# Altium PCB Callisto Control Board.PcbDoc
Units mm, origin at the board's own origin, x right, y up, seen from the top; angles counter-clockwise.
Board outline 85 x 56 mm, 4 copper layers (Top Layer, Layer 1, Layer 2, Bottom Layer), stack 1.767 mm thick; 62 components, 37 nets, 212 pads, 0 vias.
Unrouted connection lines stored in the file: 133.
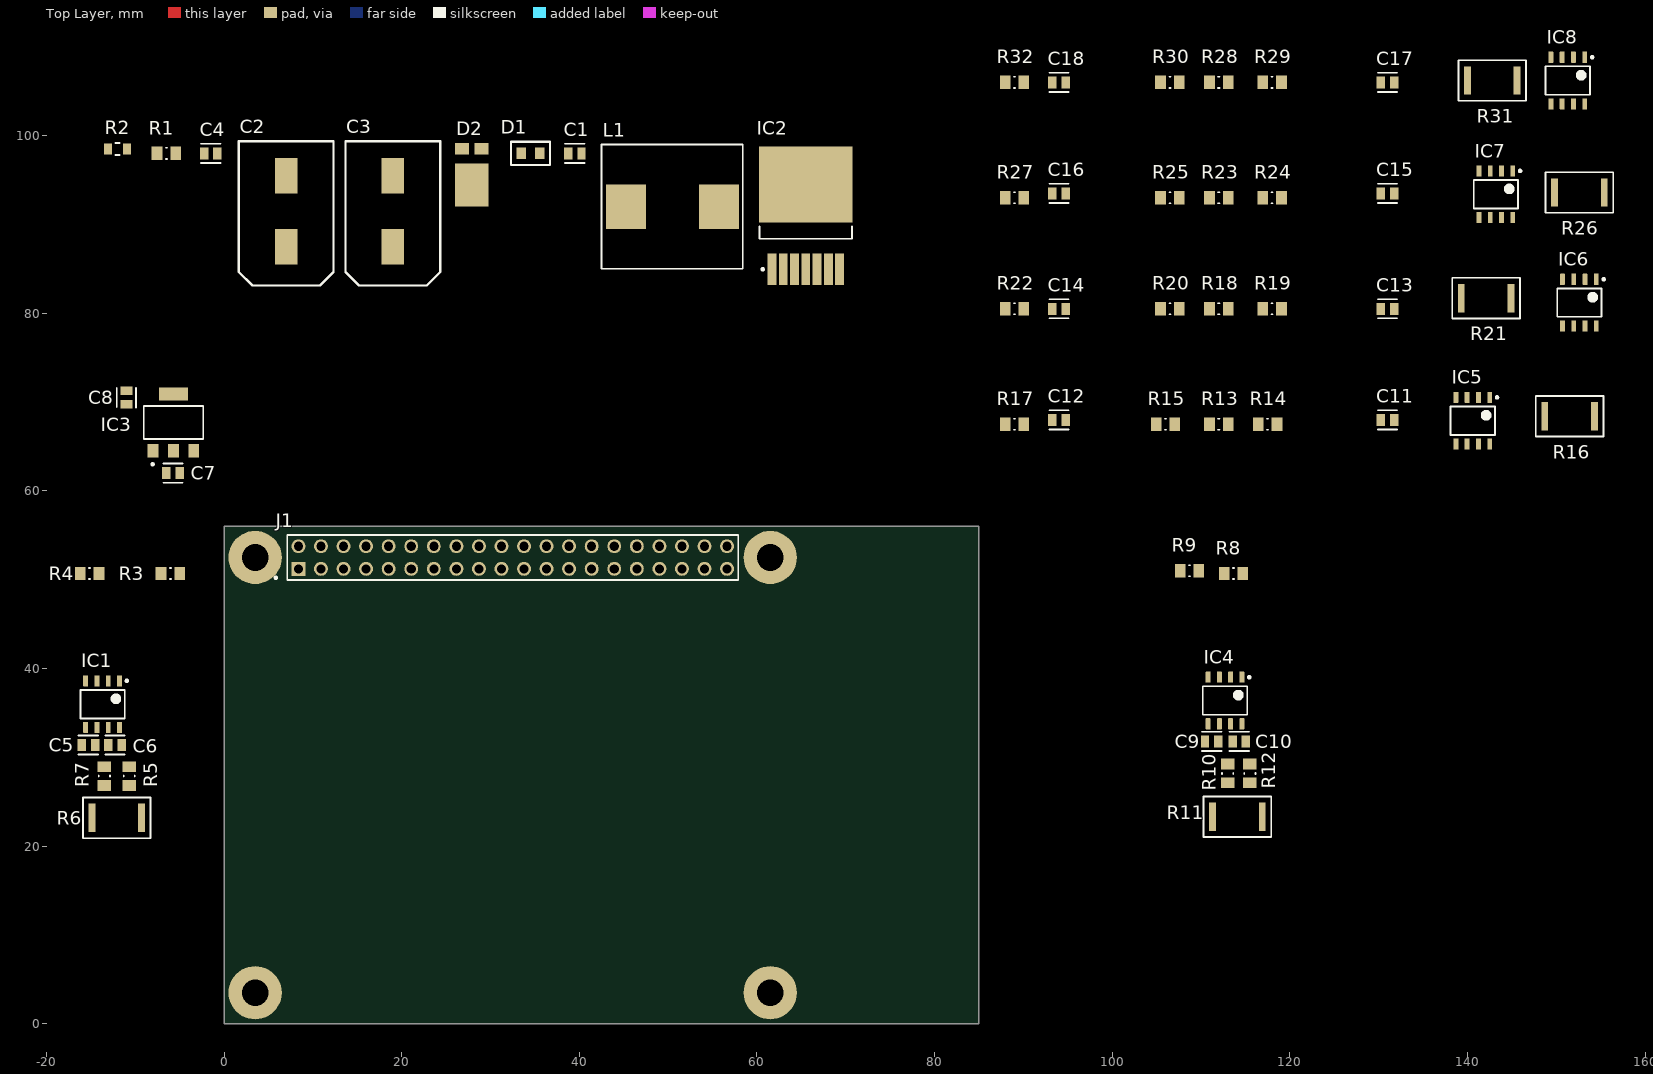
[diagram p0: Top Layer view]
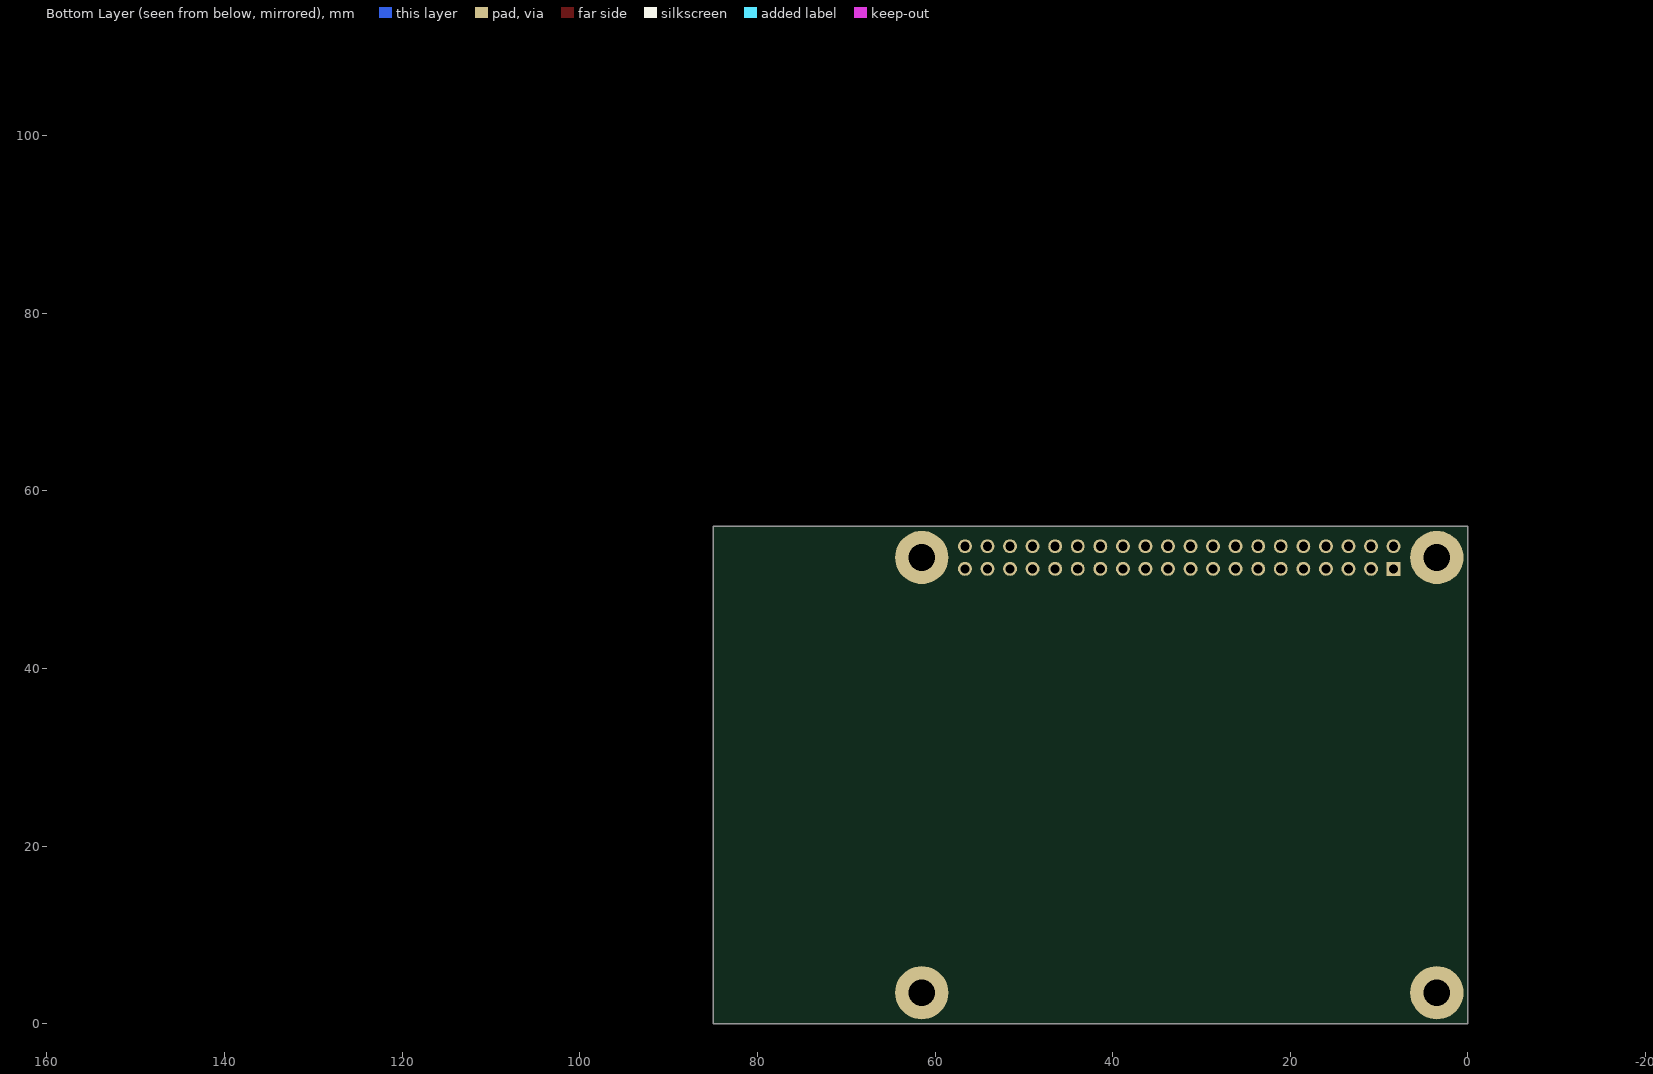
[diagram p1: Bottom Layer view, seen from below]
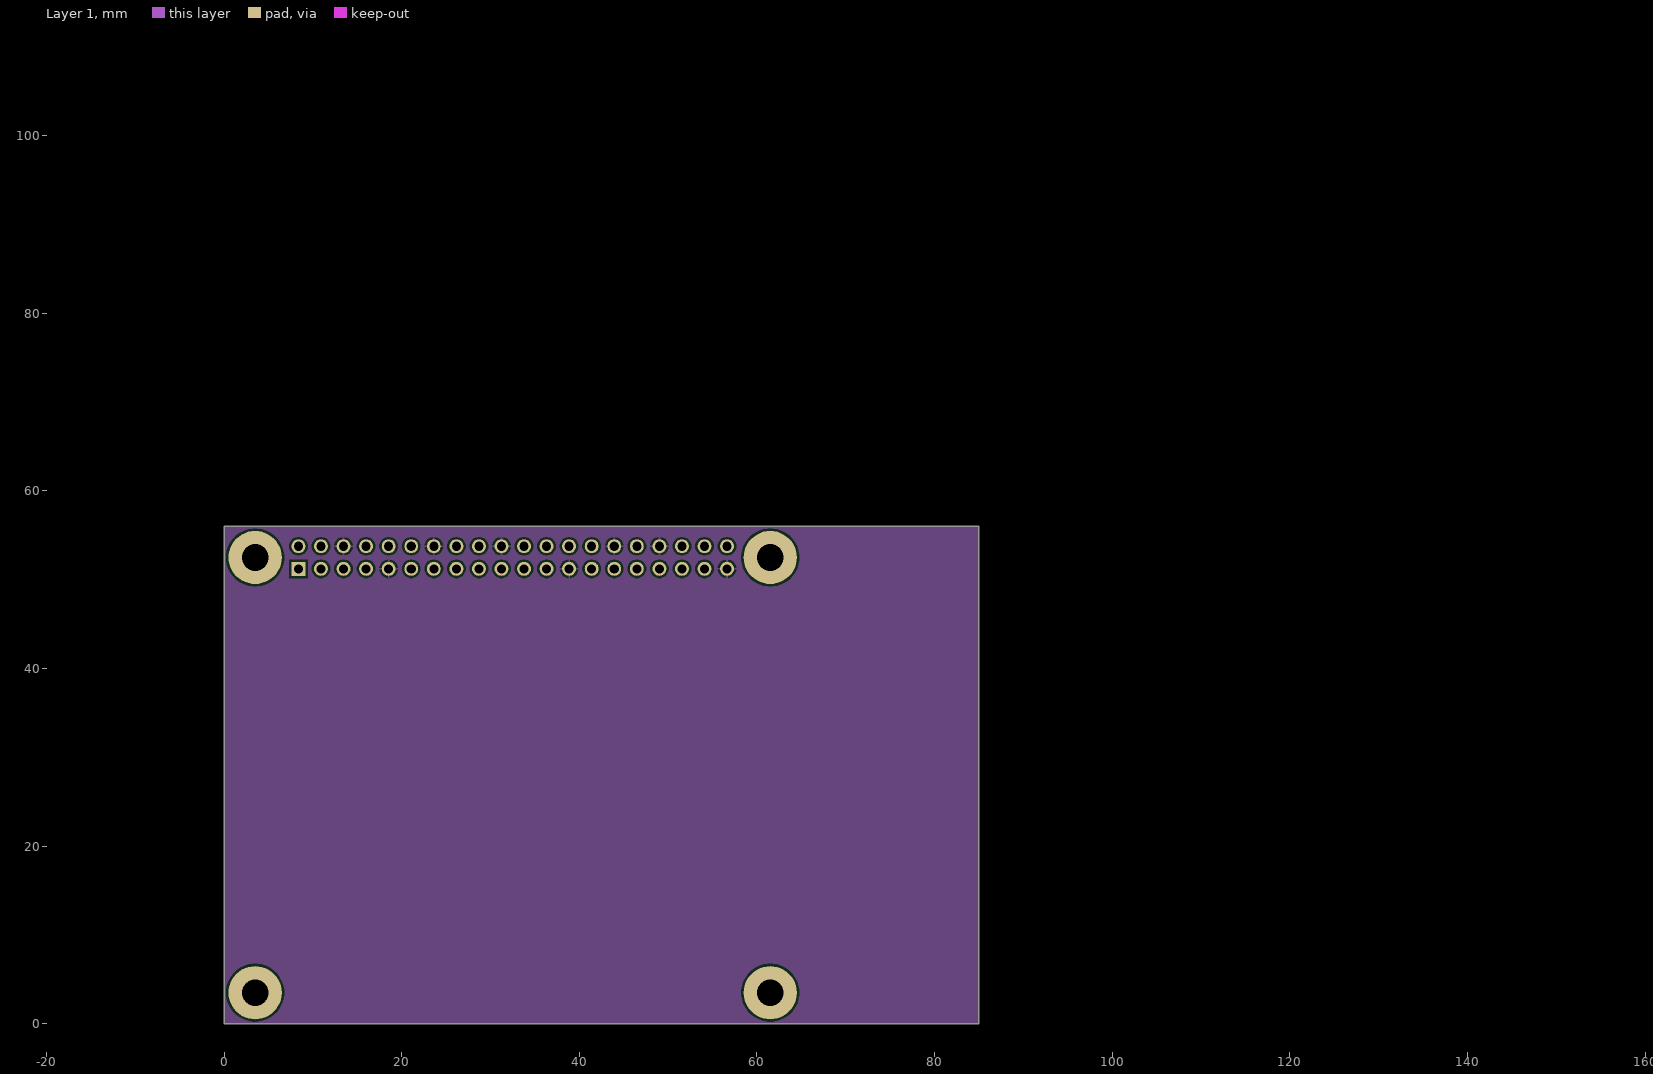
[diagram p2: Layer 1]
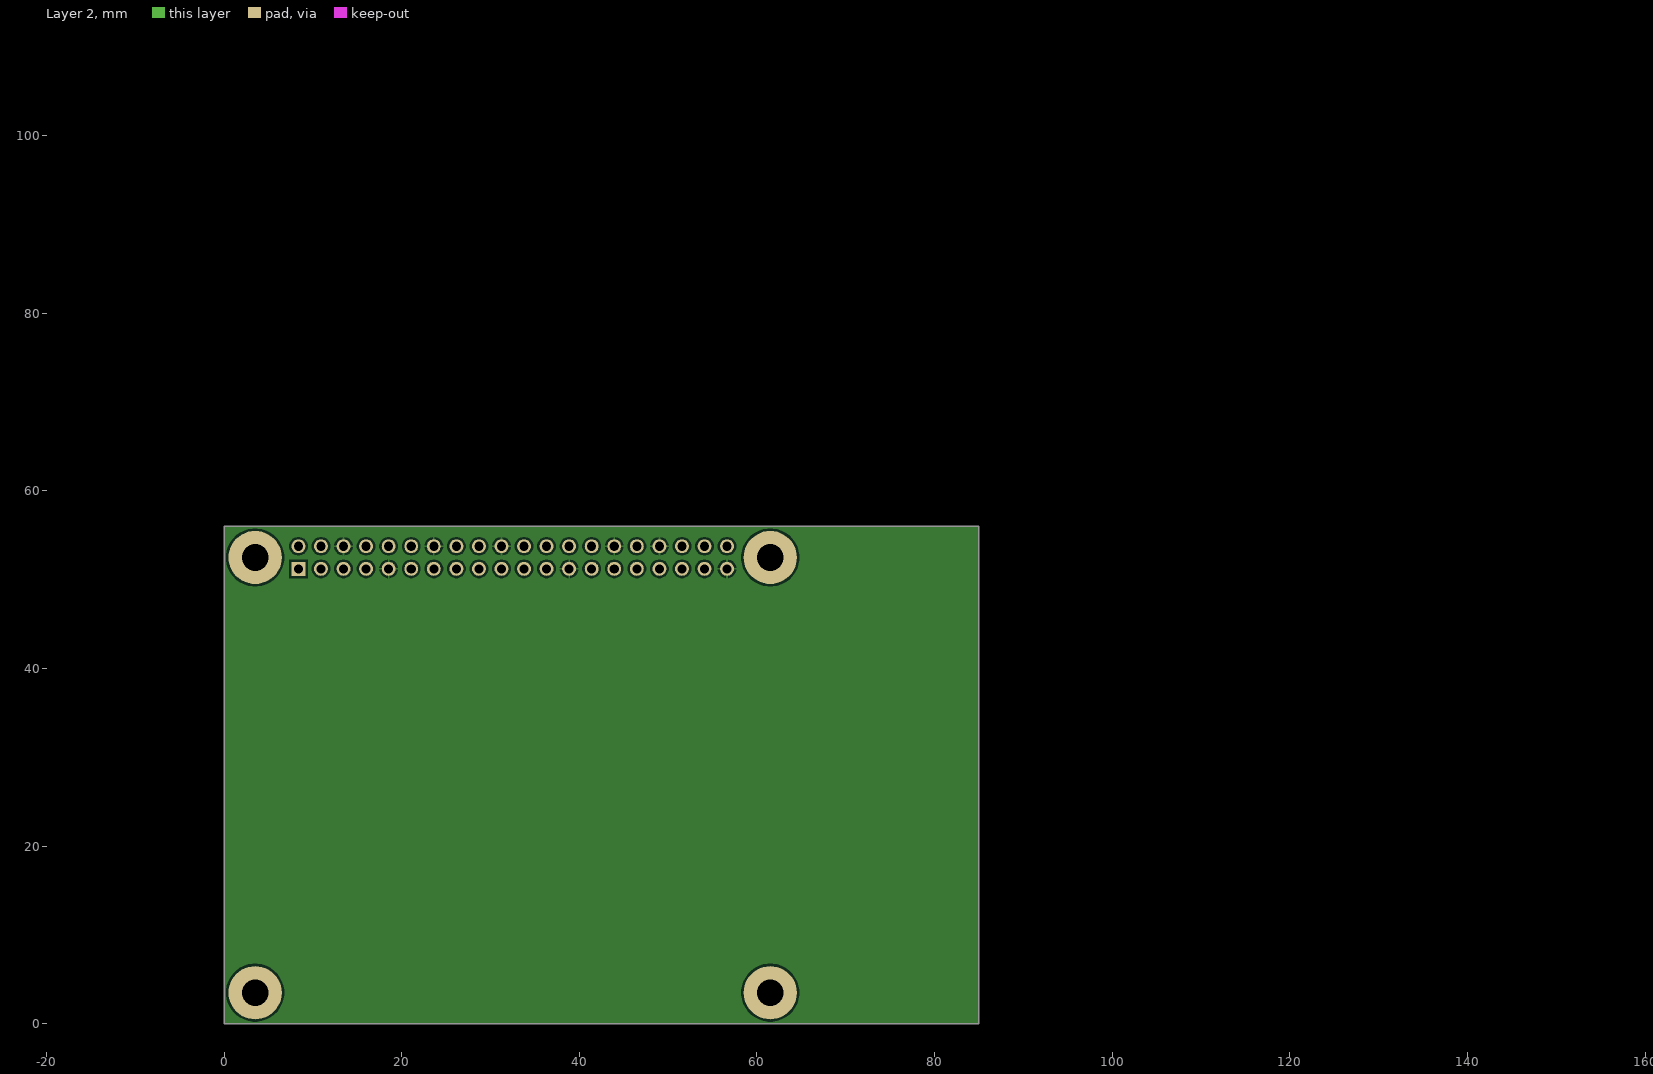
[diagram p3: Layer 2]

## Layer stack, top to bottom
Top Solder: solder mask 0.0203, Solder Resist, Dk 3.5
Top Layer: signal copper 0.0533
Dielectric 2: prepreg 0.0711, PP-006, Dk 4.1
Layer 1: signal copper 0.035
Dielectric 1: dielectric 1.4478, FR-4, Dk 4.6
Layer 2: signal copper 0.035
Dielectric 3: prepreg 0.0711, PP-006, Dk 4.1
Bottom Layer: signal copper 0.0533
Bottom Solder: solder mask 0.0203, Solder Resist, Dk 3.5

## Board outline
0,0 0,56 85,56 85,0

## Design rules (kind name [scope] priority, off if disabled: settings)
Clearance [All] p1: gap=0.254 ignorepadtopadclearanceinfootprint=FALSE except(0: Arc-Hole Track-Hole SMDPad-Hole THPad-Hole Via-Hole Fill-Hole Poly-Hole Region-Hole Text-Hole)
PolygonConnect [All] p1: connectstyle=Relief reliefconductorwidth=0.254 reliefentries=4 polygonreliefangle="90 Angle" airgapwidth=0.254
RoutingVias [All] p1: holewidth=0.711 width=1.27 viastyle="Through Hole" minholewidth=0.711 minwidth=1.27 maxholewidth=0.711 maxwidth=1.27
SolderMaskExpansion [All] p1: expansion=0.102 istentingtop=FALSE
Width [All] p1: maxlimit=0.254 minlimit=0.254 preferedwidth=0.254
30 further rules are at their usual default settings.

## Classes and differential pairs
component class "Raspberry Pi": J1
component class INA219: C17 C18 IC8 R28 R29 R30 R31 R32
component class "DC/DC Converter": C1 C2 C3 C4 D1 D2 IC2 L1 R1 R2
component class "3V3 Low Dropout Regulator": C7 C8 IC3

## Components (designator, comment, footprint, x,y, rotation, side; value= is the part's Value field where it differs from the comment)
C1 "10nF" FP-C0805C-DN-MFG 39.5,98 r0 top value="10,000 pF"
C2 "100uF" AHA1010101M040R 7,91.5 r90 top
C3 "100uF" AHA1010101M040R 19,91.5 r90 top
C4 "470pF" FP-C0805C-DN-MFG -1.5,98 r0 top value="470 pF"
C5 "0.1 uF" FP-C0805C-DN-MFG -15.276,31.386 r0 top value="0.10 μF"
C6 "0.1 uF" FP-C0805C-DN-MFG -12.276,31.386 r180 top value="0.10 μF"
C7 "0.1 μF" FP-C0805C-DN-MFG -5.75,62 r180 top
C8 "10 uF" FP-C0805C-DG-MFG -11,70.5 r270 top
C9 "0.1 uF" FP-C0805C-DN-MFG 111.2,31.8 r0 top value="0.10 μF"
C10 "0.1 uF" FP-C0805C-DN-MFG 114.3,31.8 r180 top value="0.10 μF"
C11 "0.1 uF" FP-C0805C-DN-MFG 131,68 r0 top value="0.10 μF"
C12 "0.1 uF" FP-C0805C-DN-MFG 94,68 r0 top value="0.10 μF"
C13 "0.1 uF" FP-C0805C-DN-MFG 131,80.5 r0 top value="0.10 μF"
C14 "0.1 uF" FP-C0805C-DN-MFG 94,80.5 r0 top value="0.10 μF"
C15 "0.1 uF" FP-C0805C-DN-MFG 131,93.5 r0 top value="0.10 μF"
C16 "0.1 uF" FP-C0805C-DN-MFG 94,93.5 r0 top value="0.10 μF"
C17 "0.1 uF" FP-C0805C-DN-MFG 131,106 r0 top value="0.10 μF"
C18 "0.1 uF" FP-C0805C-DN-MFG 94,106 r0 top value="0.10 μF"
D1 "0805 GREEN" "0805 LED" 34.5,98 r0 top
D2 "PMEG045V050EPEZ" PMEG045V050EPE 26,92 r0 top
IC1 "INA219AIDR" INA219AIDR -13.676,35.986 r270 top
IC2 "LM2679SX-12" TS7B_M 65.5,91 r90 top
IC3 "LD1117S33CTR" LD1117 -5.7,67.7 r90 top
IC4 "INA219AIDR" INA219AIDR 112.7,36.4 r270 top
IC5 "INA219AIDR" INA219AIDR 140.6,67.9 r270 top
IC6 "INA219AIDR" INA219AIDR 152.6,81.2 r270 top
IC7 "INA219AIDR" INA219AIDR 143.2,93.4 r270 top
IC8 "INA219AIDR" INA219AIDR 151.3,106.2 r270 top
J1 "PRT-16763" FP-SFH11-PBPC-D20-ST-BK-MFG 8.375,51.225 r0 top
L1 "7443551331" "7443551331 33uH" 50.5,92 r0 top
R1 "5k6" FP-CRCW0805-e3-IPC_A -6.5,98 r0 top
R2 "RT0805DRE07511RL" FP-RT0805-MFG -12,98.5 r0 top value=511Ω
R3 "3k3" "0805 Resistor - IPC A" -6.051,50.7 r180 top
R4 "3k3" "0805 Resistor - IPC A" -15.126,50.7 r180 top
R5 "10R" "0805 Resistor - IPC A" -10.676,27.886 r270 top
R6 "100 mΩ" PE2512FKM070R1L -12.076,23.186 r0 top
R7 "10R" "0805 Resistor - IPC A" -13.476,27.886 r270 top
R8 "3k3" "0805 Resistor - IPC A" 113.651,50.7 r0 top
R9 "3k3" "0805 Resistor - IPC A" 108.7,51 r0 top
R10 "10R" "0805 Resistor - IPC A" 113,28.2 r270 top
R11 "100 mΩ" PE2512FKM070R1L 114.1,23.3 r180 top
R12 "10R" "0805 Resistor - IPC A" 115.5,28.2 r90 top
R13 "3k3" "0805 Resistor - IPC A" 112,67.5 r0 top
R14 "3k3" "0805 Resistor - IPC A" 117.5,67.5 r0 top
R15 "10R" "0805 Resistor - IPC A" 106,67.5 r0 top
R16 "100 mΩ" PE2512FKM070R1L 151.5,68.4 r0 top
R17 "10R" "0805 Resistor - IPC A" 89,67.5 r0 top
R18 "3k3" "0805 Resistor - IPC A" 112,80.5 r0 top
R19 "3k3" "0805 Resistor - IPC A" 118,80.5 r0 top
R20 "10R" "0805 Resistor - IPC A" 106.5,80.5 r0 top
R21 "100 mΩ" PE2512FKM070R1L 142.1,81.7 r0 top
R22 "10R" "0805 Resistor - IPC A" 89,80.5 r0 top
R23 "3k3" "0805 Resistor - IPC A" 112,93 r0 top
R24 "3k3" "0805 Resistor - IPC A" 118,93 r0 top
R25 "10R" "0805 Resistor - IPC A" 106.5,93 r0 top
R26 "100 mΩ" PE2512FKM070R1L 152.6,93.6 r0 top
R27 "10R" "0805 Resistor - IPC A" 89,93 r0 top
R28 "3k3" "0805 Resistor - IPC A" 112,106 r0 top
R29 "3k3" "0805 Resistor - IPC A" 118,106 r0 top
R30 "10R" "0805 Resistor - IPC A" 106.5,106 r0 top
R31 "100 mΩ" PE2512FKM070R1L 142.795,106.2 r0 top
R32 "10R" "0805 Resistor - IPC A" 89,106 r0 top

## Footprints (in the part's own frame and the unit in brackets; to place one, negate y for a bottom-side part, rotate by r counter-clockwise, add the part's x,y. Pads: shape width x height; smd on the part's side, far side on the other; paste and mask are expansions set on the pad)
"0805 LED" [mm] "Wurth Electronics  / 150080VS75000"
  rect 1.1x1.3 smd: 1(-1.05,0) 2(1.05,0)
  round 1 on Top Overlay: ""(-3.1,-2)
  silkscreen extent -2.2,-1.3 2.2,1.3
"0805 Resistor - IPC A" [mil]
  rect 47.5x59.38 smd paste+0 mask+0: 1(-41.37,0) 2(41.37,0)
  silkscreen extent -3,-25 3,25, body extent -85,-49 85,49, height 10
"7443551331 33uH" [mm] "Wurth Electronics 7443551331 33uH"
  rect 4.5x5 smd: 1(-5.25,0) 2(5.25,0)
  silkscreen extent -8,-7 7.9,7
AHA1010101M040R [mm]
  rect 4x2.5 smd: 1(-4,0) 2(4,0)
  silkscreen extent -8.38,-5.33 7.87,5.33
FP-C0805C-DG-MFG [mm]
  rect 0.95x1.35 smd paste+0 mask+0: 1(-0.75,0) 2(0.75,0)
  silkscreen extent -1.11,-1.08 1.1,1.07, body extent -1.4,-0.85 1.4,0.85, height 0.25
FP-C0805C-DN-MFG [mm]
  rect 0.95x1.35 smd paste+0 mask+0: 1(-0.75,0) 2(0.75,0)
  silkscreen extent -1.1,-1.07 1.1,1.07, body extent -1.4,-0.85 1.4,0.85, height 0.25
FP-CRCW0805-e3-IPC_A [mil]
  rect 47.5x59.38 smd paste+0 mask+0: 1(-41.37,0) 2(41.37,0)
  silkscreen extent -3,-25 3,25, body extent -85,-49 85,49, height 10
FP-RT0805-MFG [mm]
  rect 0.9x1.2 smd paste+0 mask+0: 1(-1.05,0) 2(1.05,0)
  silkscreen extent -0.23,-0.67 0.23,0.67, body extent -1.6,-0.77 1.6,0.77, height 0.25
FP-SFH11-PBPC-D20-ST-BK-MFG [mm]
  rect 1.57x1.57 hole 1.02 paste-2539.97 mask+0: 1(0,0)
  round 1.57 hole 1.02 paste-2539.97 mask+0: 2(0,2.54) 3(2.54,0) 4(2.54,2.54) 5(5.08,0) 6(5.08,2.54) 7(7.62,0) 8(7.62,2.54) 9(10.16,0) 10(10.16,2.54) 11(12.7,0) 12(12.7,2.54) 13(15.24,0) 14(15.24,2.54) 15(17.78,0) 16(17.78,2.54) 17(20.32,0) 18(20.32,2.54) 19(22.86,0) 20(22.86,2.54) 21(25.4,0) 22(25.4,2.54) 23(27.94,0) 24(27.94,2.54) 25(30.48,0) 26(30.48,2.54) 27(33.02,0) 28(33.02,2.54) 29(35.56,0) 30(35.56,2.54) 31(38.1,0) 32(38.1,2.54) 33(40.64,0) 34(40.64,2.54) 35(43.18,0) 36(43.18,2.54) 37(45.72,0) 38(45.72,2.54) 39(48.26,0) 40(48.26,2.54)
  silkscreen extent -2.66,-1.26 49.53,3.82
INA219AIDR [mm] "SOIC, 8-Leads, Body 5x4mm, Pitch 1.27mm, IPC High Density"
  rrect18% 1.25x0.55 smd: 1(-2.625,1.905) 2(-2.625,0.635) 3(-2.625,-0.635) 4(-2.625,-1.905) 5(2.625,-1.905) 6(2.625,-0.635) 7(2.625,0.635) 8(2.625,1.905)
  silkscreen extent -2.75,-2.5 1.6,2.86, body extent -3,-2.45 3,2.45, height 1.63
LD1117 [mm]
  rect 1.5x1.2 smd paste+0 mask+0: 1(-3.2,2.3) 2(-3.2,0) 3(-3.2,-2.3)
  rect 1.5x3.3 smd paste+0 mask+0: 4(3.2,0)
  silkscreen extent -4.82,-3.35 1.85,3.35, body extent -4.05,-3.45 4.05,3.45, height 0.25
PE2512FKM070R1L [mm]
  rect 0.76x3.18 smd: 1(-2.795,0) 2(2.795,0)
  silkscreen extent -3.81,-2.29 3.81,2.29
PMEG045V050EPE [mm]
  rect 1.6x1.3 smd: 1(0.8,6.5) 2(3,6.5)
  rect 3.8x4.85 smd: 3(1.9,2.425)
TS7B_M [mm] "D2-PAK, 8-Leads, Body 8.6x10.2mm, Pitch 1.27mm, Lead Span 14.1mm, IPC Low Density"
  rect 3.5x1 smd: 1(-6.05,3.81) 2(-6.05,2.54) 3(-6.05,1.27) 4(-6.05,0) 5(-6.05,-1.27) 6(-6.05,-2.54) 7(-6.05,-3.81)
  rect 8.6x10.55 smd: 8(3.5,0)
  silkscreen extent -6.17,-5.2 -1.2,5.2, body extent -2.6,-5.2 6.29,5.2, height 4.64

## Part data
C1: library part CMP-03020-003256-1, "C0805 10,000 pF C0G 30ppm/°C 5.00% 50 V", Capacitance="10,000 pF", Manufacturer=KEMET, Manufacturer Part Number=C0805C103J5GAC, Package=C0805C-DN, Temperature="-55°C to +125°C", Temperature Characteristic=C0G, Temperature Coefficient=30ppm/°C, Temperature Range High=+125°C, Temperature Range Low=-55°C, Tolerance=0.05, Voltage Rating="50 V", Automotive=No, Category=Cap, ComponentLink2Description=Datasheet, ComponentLink2URL=https://content.kemet.com/datasheets/KEM_C1003_C0G_SMD.pdf, Device Class L1="Passive Components", Device Class L2=Capacitors, Device Class L3="Ceramic Capacitors", Height=0.88mm, Ipc Land Pattern Name=CAPC200125X78, Lead Free=Yes, Material=Ceramic, Mouser Description="Multilayer Ceramic Capacitors MLCC - SMD/SMT 50volts 0.01uF 5% C0G", Octopart=https://octopart.com/c0805c103j5gac-kemet-22233108, RoHS=TRUE
C2 C3: "Kyocera AHA1010101M040R"
C4: library part CMP-03020-010584-1, "C0805 470 pF C0G 30ppm/°C 5.00% 50 V", Capacitance="470 pF", Manufacturer=KEMET, Manufacturer Part Number=C0805C471J5GAC, Package=C0805C-DN, Temperature="-55°C to +125°C", Temperature Characteristic=C0G, Temperature Coefficient=30ppm/°C, Temperature Range High=+125°C, Temperature Range Low=-55°C, Tolerance=0.05, Voltage Rating="50 V", Automotive=No, Category=Cap, ComponentLink2Description=Datasheet, ComponentLink2URL=https://content.kemet.com/datasheets/KEM_C1003_C0G_SMD.pdf, Device Class L1="Passive Components", Device Class L2=Capacitors, Device Class L3="Ceramic Capacitors", Height=0.88mm, Ipc Land Pattern Name=CAPC200125X78, Lead Free=Yes, Material=Ceramic, Mouser Description="Multilayer Ceramic Capacitors MLCC - SMD/SMT 50volts 470pF 5% C0G", Octopart=https://octopart.com/c0805c471j5gac-kemet-1364888, RoHS=TRUE
C5 C6 C9 C10 C11 C12 C13 C14 C15 C16 C17 C18: library part CMP-03020-002581-2, "C0805 0.10 μF X7R 30ppm/°C 20.00% 50 V C0805C104M5RAC", Capacitance="0.10 μF", Manufacturer=KEMET, Manufacturer Part Number=C0805C104M5RAC, Package=C0805C-DN, Temperature="-55°C to +125°C", Temperature Characteristic=X7R, Temperature Coefficient=30ppm/°C, Temperature Range High=+125°C, Temperature Range Low=-55°C, Tolerance=0.2, Voltage Rating="50 V", Automotive=No, Category=Cap, ComponentLink2Description=Datasheet, ComponentLink2URL=https://content.kemet.com/datasheets/KEM_C1003_C0G_SMD.pdf, Device Class L1="Passive Components", Device Class L2=Capacitors, Device Class L3="Ceramic Capacitors", Height=0.88mm, Ipc Land Pattern Name=CAPC200125X78, Lead Free=Yes, Material=Ceramic, Mouser Description="Multilayer Ceramic Capacitors MLCC - SMD/SMT 50volts 0.1uF 20% X7R", Octopart=https://octopart.com/c0805c104m5rac-kemet-2226142, RoHS=TRUE
C7: library part CMP-03020-002581-2, "C0805 0.10 μF X7R 30ppm/°C 20.00% 50 V C0805C104M5RAC", Manufacturer=KEMET, Manufacturer Part Number=C0805C104M5RAC, Package=C0805C-DN, Temperature="-55°C to +125°C", Temperature Characteristic=X7R, Temperature Coefficient=30ppm/°C, Temperature Range High=+125°C, Temperature Range Low=-55°C, Tolerance=0.2, Voltage Rating="50 V", Automotive=No, Capacitance="0.1 μF", Category=Cap, ComponentLink2Description=Datasheet, ComponentLink2URL=https://content.kemet.com/datasheets/KEM_C1003_C0G_SMD.pdf, Device Class L1="Passive Components", Device Class L2=Capacitors, Device Class L3="Ceramic Capacitors", Height=0.88mm, Ipc Land Pattern Name=CAPC200125X78, Lead Free=Yes, Material=Ceramic, Mouser Description="Multilayer Ceramic Capacitors MLCC - SMD/SMT 50volts 0.1uF 20% X7R", Octopart=https://octopart.com/c0805c104m5rac-kemet-2226142, RoHS=TRUE
C8: library part CMP-2007-03243-2, "CAP CER 10UF 10V X5R 0805 / C0805C106K8PACTU", 3DS Part Number=220-00001, Manufacturer=Kemet, Manufacturer Part Number=C0805C106K8PACTU, Package=C0805C-DG, Temperature="-55°C to +85°C", Temperature Characteristic=X5R, Temperature Coefficient=15%, Temperature Range High=+85°C, Temperature Range Low=-55°C, Tolerance=10%, Voltage=10V, Automotive=No, Capacitance="10 uF", Category=Cap, ComponentLink2Description=Datasheet, ComponentLink2URL=https://content.kemet.com/datasheets/KEM_C1006_X5R_SMD.pdf, Device Class L1="Passive Components", Device Class L2=Capacitors, Device Class L3="Ceramic Capacitors", Digikey Description="CAP CER 10UF 10V X5R 0805", Height=1.4mm, Ipc Land Pattern Name=CAPC200125X125, Lead Free=Yes, Material=Ceramic, Mouser Description="CAP CER 10UF 10V X5R 0805", Octopart=https://octopart.com/c0805c106k8pactu-kemet-98697, RoHS=TRUE, Voltage Rating=10V
D1: library part "0805 LED", "Wurth Electronics 150080VS75000"
IC1 IC4 IC5 IC6 IC7 IC8: "Current & Power Monitors & Regulators Zero-Drift,Bi-Dir Crnt/Pwr Monitor"
IC2: "LM2679SX-12/NOPB"
IC3: "IC REG LINEAR 3.3V 800MA SOT223"
J1: library part "Raspberry Pi 3+ Header", "Headers & Wire Housings Extended GPIO Female Header - 2x20 Pin (16mm/7.30mm)"
L1: "Wurth Electronics 7443551331"
R1: library part CMP-2001-04030-2, "RES Thick Film, 5.6kΩ, 1%, 0.125W, 100ppm/°C, 0805", Case Code (Imperial)=0805, Case Code (Metric)=2012, Max Operating Temperature=155°C, Max Power Dissipation=125mW, Min Operating Temperature=-55°C, Package Quantity=1, Resistance=5.6kR, Temperature Coefficient=100ppm/°C, Tolerance=1%, Voltage Rating=150V, Case/Package=0805, Composition="Thick Film", Contact Plating=Tin, Depth=1.25mm, Features="Automotive AEC-Q200", Height=0.45mm, Lead Free="Lead Free", Length=2mm, Military Standard=Not, Mount="Surface Mount", Number of Pins=2, Number of Terminations=2, Packaging="Tape and Reel", Power Rating=125mW, Radiation Hardening=No, Termination=SMD/SMT, Voltage Rating (DC)=150V, Weight=0.000194oz, Width=1.25mm
R2: library part CMP-03412-001492-1, "RES SMD 511 OHM 0.5% 1/8W 0805", Manufacturer=Yageo, Package=RT0805, Power Rating=0.125W, Resistance=511Ω, Temperature="-55°C to +155°C", Temperature Coefficient="50 ppm/°C", Temperature Range High=+155°C, Temperature Range Low=-55°C, Tolerance=0.01, Voltage Rating=150V, Automotive=No, Category=Res, ComponentLink2Description=Datasheet, ComponentLink2URL=http://www.yageo.com/documents/recent/PYu-RT_1-to-0.01_RoHS_L_9.pdf, Composition="Thin Film", Device Class L1="Passive Components", Device Class L2=Resistors, Device Class L3="Chip SMD Resistors", Digikey Description="RES SMD 511 OHM 0.5% 1/8W 0805", Footprint Url=http://www.yageo.com/exep/pages/download/literatures/PYu-R_Mount_10.pdf, Height=0.6mm, Ipc Land Pattern Name=RESC200125X50, Lead Free=Yes, Manufacturer Part Number=RT0805DRE07511RL, Octopart=https://octopart.com/rt0805dre07511rl-yageo-1369364, RoHS=TRUE, Series=RT
R3 R4 R8 R9 R13 R14 R18 R19 R23 R24 R28 R29: library part RE0805FRE073K3L, "Thick Film Resistors - SMD 3.3 kOhms 125 mW 0805 1% / RE0805FRE073K3L"
R5 R7 R10 R12 R15 R17 R20 R22 R25 R27 R30 R32: library part RC0805FR-0710RL, "Thick Film Resistors - SMD 10 Ohms 125 mW 0805 1% / RC0805FR-0710RL"
R6 R11 R16 R21 R26 R31: library part PE2512FKM070R1L, "Current Sense Resistors - SMD 100 mOhms 1 Watt 1 % 75 ppm/C AEC-Q200 / PE2512FKM070R1L"

## Free pads (board coordinates)
  round 6 hole 3: 8(3.5,3.5) 8(3.5,52.5) 8(61.5,3.5) 8(61.5,52.5)

## Nets (pads, with @x,y where several pads share a name; then routed paths per layer and width w, separated by ;. In a path a pad name is that pad's centre, name@x,y a point inside that pad or via, vN(x,y) a via of type N, cw(c..) or ccw(c..) an arc to the next point about the centre after c; other vN are vias at no path point)
12V_SW_GND: C2.2 C3.2 C4.2 D2.1 D2.2 IC2.4 IC2.8 R1.1 R2.1
+3V3_LDO: C5.1 C8.1 C9.1 C11.1 C13.1 C15.1 C17.1 IC1.5 IC3.2 IC3.4 IC4.5 IC5.5 IC6.5 IC7.5 IC8.5 R3.2 R4.2 R8.2 R9.2 R13.2 R14.2 R18.2 R19.2 R23.2 R24.2 R28.2 R29.2
BOOST: C1.2 IC2.3
CURRENT_ADJ: IC2.5 R1.2
FEEDBACK: C3.1 D1.2 IC2.6 L1.2
GND: C5.2 C7.2 C8.2 C9.2 C11.2 C13.2 C15.2 C17.2 IC1.1 IC1.2 IC1.6 IC3.1 IC4.1 IC4.6 IC5.1 IC5.6 IC6.2 IC6.6 IC7.6 IC8.6 J1.6 J1.9 J1.14 J1.20 J1.25 J1.30 J1.34 J1.39
NetC2_1: C2.1 IC2.2
NetC6_1: C6.1 IC1.8 R5.1
NetC6_2: C6.2 IC1.7 R7.1
NetC7_1: C7.1 IC3.3
NetC10_1: C10.1 IC4.8 R10.1
NetC10_2: C10.2 IC4.7 R12.1
NetC12_1: C12.1 IC5.8 R15.1
NetC12_2: C12.2 IC5.7 R17.1
NetC14_1: C14.1 IC6.8 R20.1
NetC14_2: C14.2 IC6.7 R22.1
NetC16_1: C16.1 IC7.8 R25.1
NetC16_2: C16.2 IC7.7 R27.1
NetC18_1: C18.1 IC8.8 R30.1
NetC18_2: C18.2 IC8.7 R32.1
NetD1_1: D1.1 R2.2
NetR5_2: R5.2 R6.2
NetR6_1: R6.1 R7.2
NetR10_2: R10.2 R11.2
NetR11_1: R11.1 R12.2
NetR15_2: R15.2 R16.2
NetR16_1: R16.1 R17.2
NetR20_2: R20.2 R21.2
NetR21_1: R21.1 R22.2
NetR25_2: R25.2 R26.2
NetR26_1: R26.1 R27.2
NetR30_2: R30.2 R31.2
NetR31_1: R31.1 R32.2
SCL: IC1.4 IC4.4 IC5.2 IC5.4 IC6.4 IC7.4 IC8.2 IC8.4 J1.5 R4.1 R9.1 R14.1 R19.1 R24.1 R29.1
SDA: IC1.3 IC4.2 IC4.3 IC5.3 IC6.1 IC6.3 IC7.1 IC7.2 IC7.3 IC8.1 IC8.3 J1.3 R3.1 R8.1 R13.1 R18.1 R23.1 R28.1
SOFTSTART: C4.1 IC2.7
SW_NODE: C1.1 D2.3 IC2.1 L1.1
pads on no net: D1. J1.1 J1.2 J1.4 J1.7 J1.8 J1.10 J1.11 J1.12 J1.13 J1.15 J1.16 J1.17 J1.18 J1.19 J1.21 J1.22 J1.23 J1.24 J1.26 J1.27 J1.28 J1.29 J1.31 J1.32 J1.33 J1.35 J1.36 J1.37 J1.38 J1.40

## Polygon pours and split planes (outlines as drawn)
GND on Layer 1 "GND_L02_P001" (solid, pour order 1): 0,56 85,56 85,0 0,0
GND on Layer 2 "GND_L03_P000" (solid, pour order 0): 0,0 85,0 85,56 0,56

## Silkscreen, mask and mechanical layers (free items; w line width, h text height)
Mechanical 1:
  lines w0.254: 3.5,52.5 61.5,52.5 ; 32.5,50 32.5,55